# Altium PCB panel.PcbDoc
Units mm, origin at the board's own origin, x right, y up, seen from the top; angles counter-clockwise.
Board outline 98 x 115 mm, 2 copper layers (Top Layer, Bottom Layer), stack 1.635 mm thick; 3 components, 0 nets, 135 pads, 0 vias.
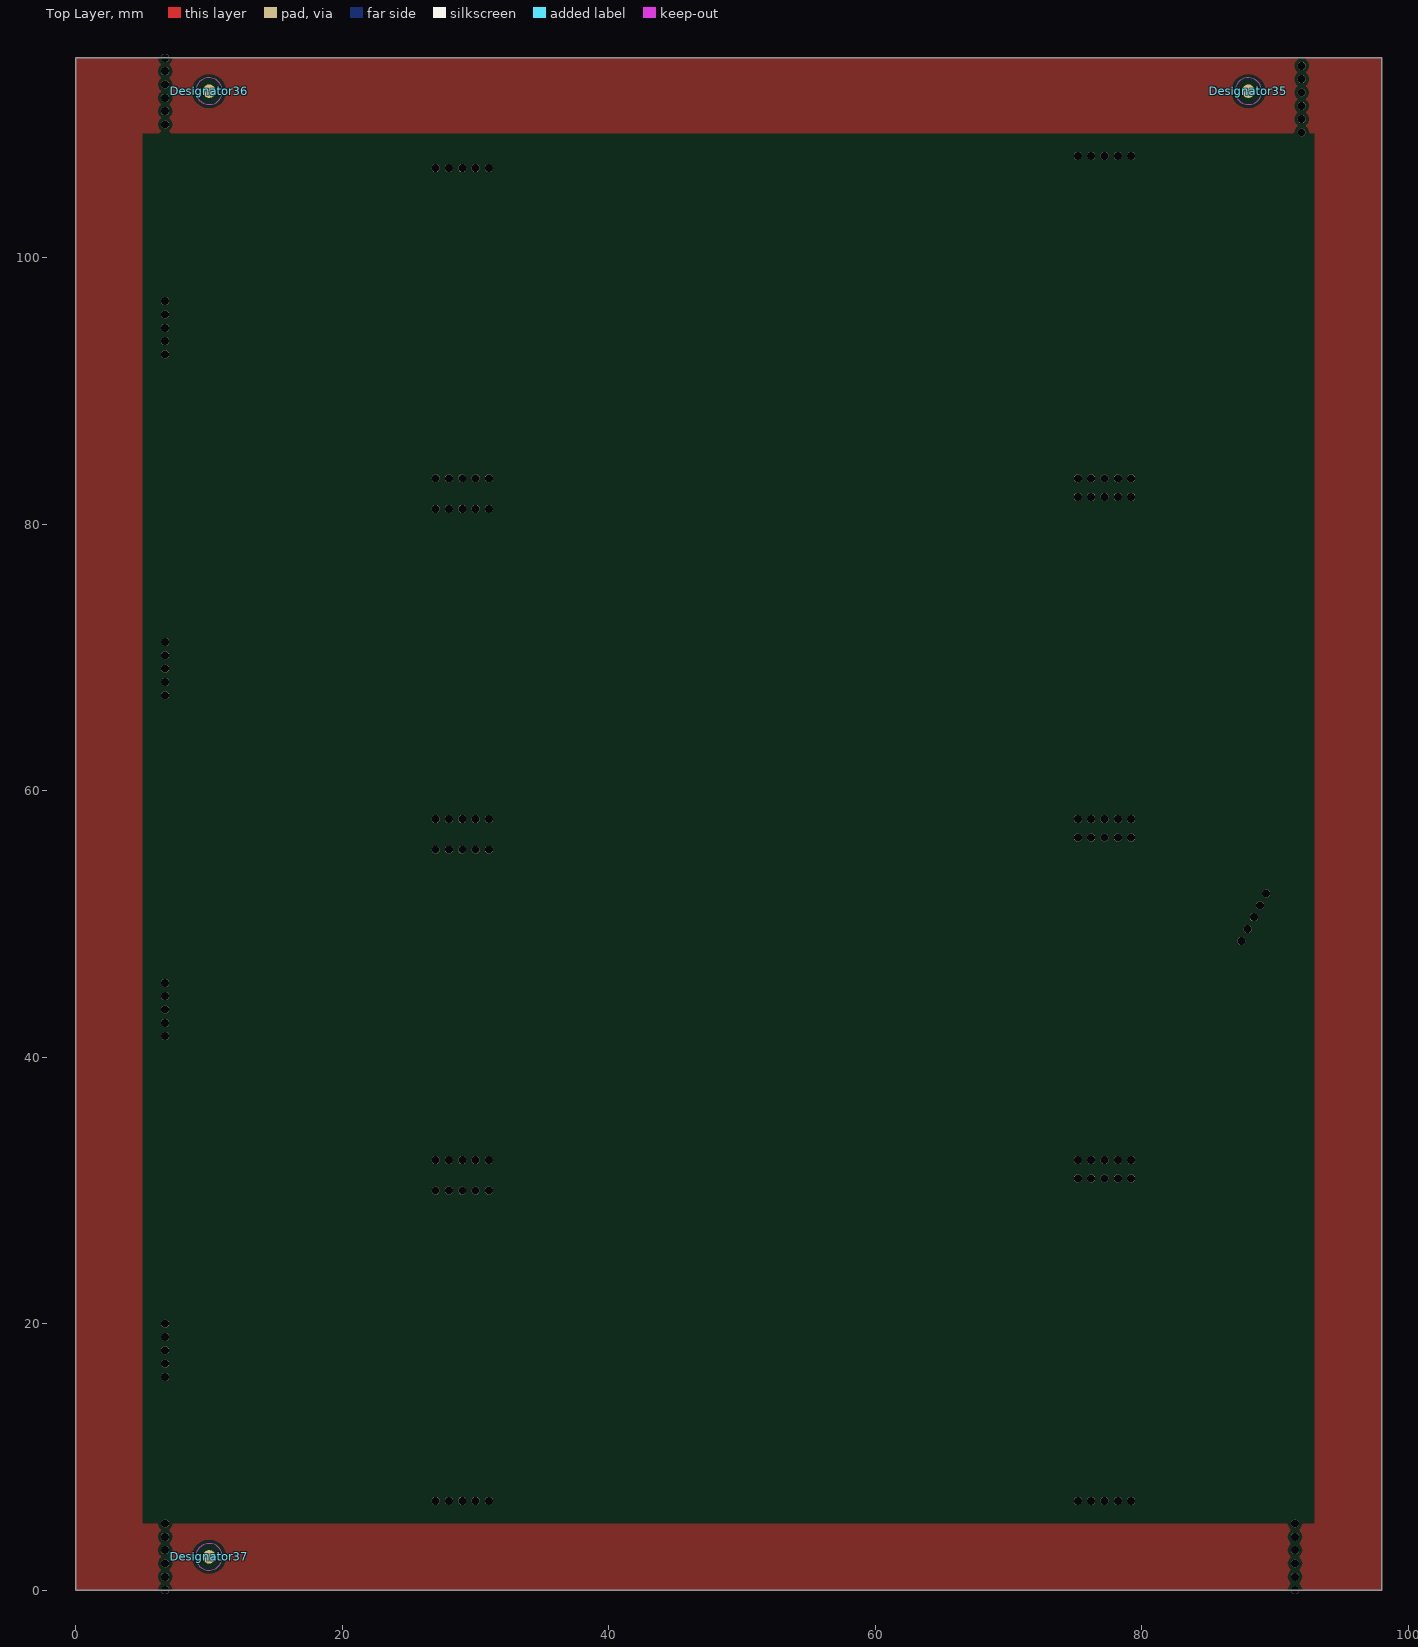
[diagram p0: Top Layer view]
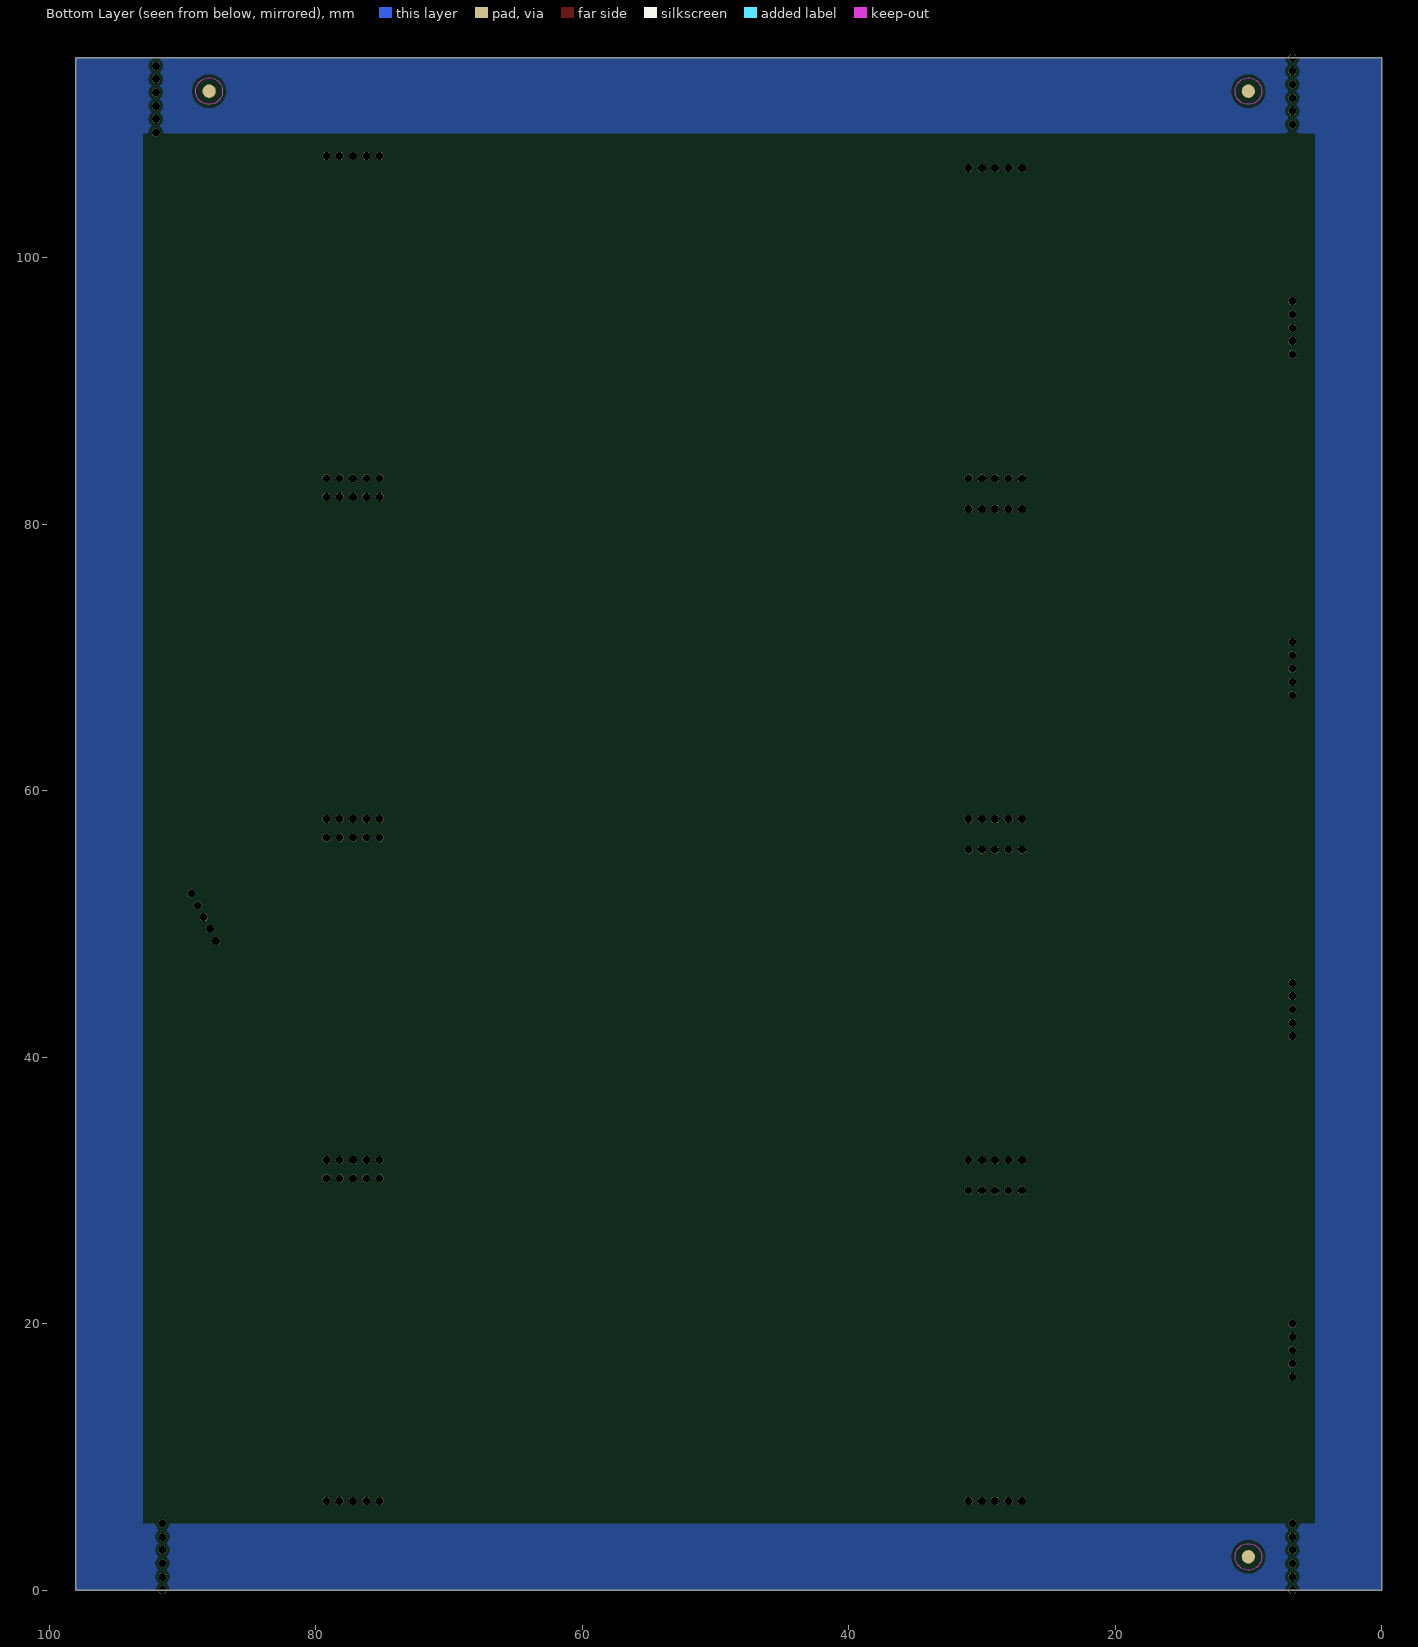
[diagram p1: Bottom Layer view, seen from below]

## Layer stack, top to bottom
Top Solder: solder mask 0.0102, Solder Resist, Dk 3.5
Top Layer: signal copper 0.0175
Dielectric 1: core 1.6, FR-4, Dk 3.72
Bottom Layer: signal copper 0.0175
Bottom Solder: solder mask 0.0102, Solder Resist, Dk 3.5

## Board outline
0,0 0,114.987 0,115 98,115 98,0

## Design rules (kind name [scope] priority, off if disabled: settings)
Clearance [All] p1: gap=0.254 ignorepadtopadclearanceinfootprint=FALSE except(0: Arc-Hole Track-Hole SMDPad-Hole THPad-Hole Via-Hole Fill-Hole Poly-Hole Region-Hole Text-Hole)
PolygonConnect [All] p1: connectstyle=Relief reliefconductorwidth=0.254 reliefentries=4 polygonreliefangle="90 Angle" airgapwidth=0.254
RoutingVias [All] p1: holewidth=0.711 width=1.27 viastyle="Through Hole" minholewidth=0.711 minwidth=1.27 maxholewidth=0.711 maxwidth=1.27
SolderMaskExpansion [All] p1: expansion=0.102 istentingtop=FALSE
Width [All] p1: maxlimit=0.254 minlimit=0.254 preferedwidth=0.254
30 further rules are at their usual default settings.

## Components (designator, comment, footprint, x,y, rotation, side; value= is the part's Value field where it differs from the comment)
Designator35 "Comment" Fiducial 88,112.5 r0 top
Designator36 "Comment" Fiducial 10,112.5 r0 top
Designator37 "Comment" Fiducial 10,2.5 r0 top

## Footprints (in the part's own frame and the unit in brackets; to place one, negate y for a bottom-side part, rotate by r counter-clockwise, add the part's x,y. Pads: shape width x height; smd on the part's side, far side on the other; paste and mask are expansions set on the pad)
Fiducial [mm] "Fiducial Mark"
  round 1 smd paste+0 mask+0.5: 0(0,0)
  round 1 smd far side paste+0 mask+0.5: 0(0,0)
  Top Layer keep-out circle w0.01: c0,0 r1
  Bottom Layer keep-out circle w0.01: c0,0 r1

## Part data
Designator35 Designator36 Designator37: library part Fid-Mark

## Free pads (board coordinates)
  round 0.6 hole 0.6 unplated: 4(6.7,0) 4(6.7,1) 4(6.7,2) 4(6.7,3) 4(6.7,4) 4(6.7,5) 4(6.7,16) 4(6.7,17) 4(6.7,18) 4(6.7,19) 4(6.7,20) 4(6.7,41.58) 4(6.7,42.58) 4(6.7,43.58) 4(6.7,44.58) 4(6.7,45.58) 4(6.7,67.16) 4(6.7,68.16) 4(6.7,69.16) 4(6.7,70.16) 4(6.7,71.16) 4(6.7,92.74) 4(6.7,93.74) 4(6.7,94.74) 4(6.7,95.74) 4(6.7,96.74) 4(6.7,110) 4(6.7,111) 4(6.7,112) 4(6.7,113) 4(6.7,114) 4(6.7,115) 4(27,6.7) 4(27,32.28) 4(27,57.86) 4(27,83.44) 4(27,29.99) 4(27,55.57) 4(27,81.15) 4(27,106.73) 4(28,6.7) 4(28,32.28) 4(28,57.86) 4(28,83.44) 4(28,29.99) 4(28,55.57) 4(28,81.15) 4(28,106.73) 4(29,6.7) 4(29,32.28) 4(29,57.86) 4(29,83.44) 4(29,29.99) 4(29,55.57) 4(29,81.15) 4(29,106.73) 4(30,6.7) 4(30,32.28) 4(30,57.86) 4(30,83.44) 4(30,29.99) 4(30,55.57) 4(30,81.15) 4(30,106.73) 4(31,6.7) 4(31,32.28) 4(31,57.86) 4(31,83.44) 4(31,29.99) 4(31,55.57) 4(31,81.15) 4(31,106.73) 4(75.2,30.9) 4(75.2,56.48) 4(75.2,82.06) 4(75.2,107.64) 4(75.2,6.7) 4(75.2,32.28) 4(75.2,57.86) 4(75.2,83.44) 4(76.2,30.9) 4(76.2,56.48) 4(76.2,82.06) 4(76.2,107.64) 4(76.2,6.7) 4(76.2,32.28) 4(76.2,57.86) 4(76.2,83.44) 4(77.2,30.9) 4(77.2,56.48) 4(77.2,82.06) 4(77.2,107.64) 4(77.2,6.7) 4(77.2,32.28) 4(77.2,57.86) 4(77.2,83.44) 4(78.2,30.9) 4(78.2,56.48) 4(78.2,82.06) 4(78.2,107.64) 4(78.2,6.7) 4(78.2,32.28) 4(78.2,57.86) 4(78.2,83.44) 4(79.2,30.9) 4(79.2,56.48) 4(79.2,82.06) 4(79.2,107.64) 4(79.2,6.7) 4(79.2,32.28) 4(79.2,57.86) 4(79.2,83.44) 4(87.47,48.72) 4(87.937,49.611) 4(88.404,50.503) 4(88.871,51.394) 4(89.337,52.285) 4(91.5,0) 4(91.5,1) 4(91.5,2) 4(91.5,3) 4(91.5,4) 4(91.5,5) 4(92,109.4) 4(92,110.4) 4(92,111.4) 4(92,112.4) 4(92,113.4) 4(92,114.4)

## Nets (pads, with @x,y where several pads share a name; then routed paths per layer and width w, separated by ;. In a path a pad name is that pad's centre, name@x,y a point inside that pad or via, vN(x,y) a via of type N, cw(c..) or ccw(c..) an arc to the next point about the centre after c; other vN are vias at no path point)
pads on no net: Designator35.0 Designator36.0 Designator37.0

## Polygon pours and split planes (outlines as drawn)
no net on Top Layer "Panel_01" (solid, pour order 2): 0,115 98,115 98,0 0,0
no net on Bottom Layer "Panel_01" (solid, pour order 5): 0,115 98,115 98,0 0,0

## Other copper
Multi-Layer:
  pour cut-out: 5,5 5,109.325 92.999,109.325 92.999,5

## Silkscreen, mask and mechanical layers (free items; w line width, h text height)
Route Tool Path:
  drawing of 221 lines, arcs and shapes, not listed
Panel Outline:
  lines w0.1: 0,114.987 0,0 98,0 98,115 0,115

## Dimensions
0,0 to 88,112.5 on Mechanical 16
0,0 to 7,7 on Mechanical 16
0,0 to 10,10 on Mechanical 16
0,0 to 12,112 on Mechanical 16
0,0 to 7,7 on Mechanical 16
0,0 to 10,10 on Mechanical 16
0,0 to 10,2.5 on Mechanical 16
0,114.987 to 10,2.5 on Mechanical 16
0,114.987 to 0,0 on Mechanical 16
0,0 to 98,0 on Mechanical 16

## Panel: embedded boards
"Mikrolysreklamen.PcbDoc" at 7,7, 4 rows x 1 columns, spacing 25.58 x 86.479, rotation 0